# Altium PCB PCB1.PcbDoc
Units mil, origin at the board's own origin, x right, y up, seen from the top; angles counter-clockwise.
Board outline 620 x 910 mil, 2 copper layers (Top Layer, Bottom Layer); 15 components, 11 nets, 62 pads, 8 vias.
Unrouted connection lines stored in the file: 1.
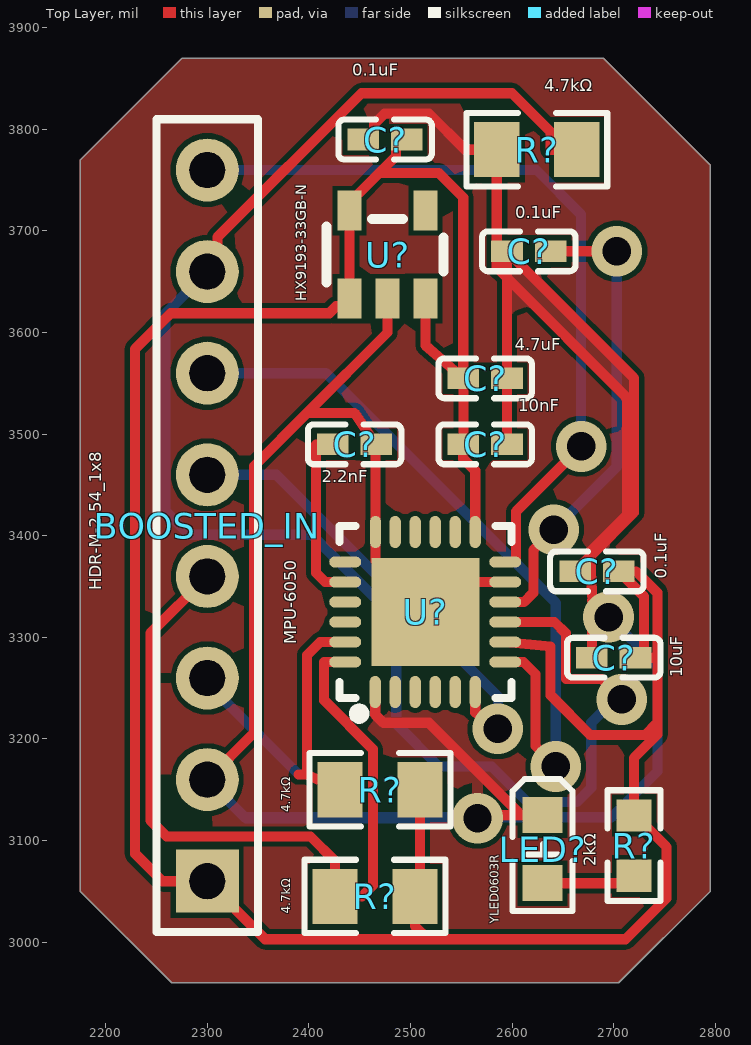
[diagram p0: Top Layer view]
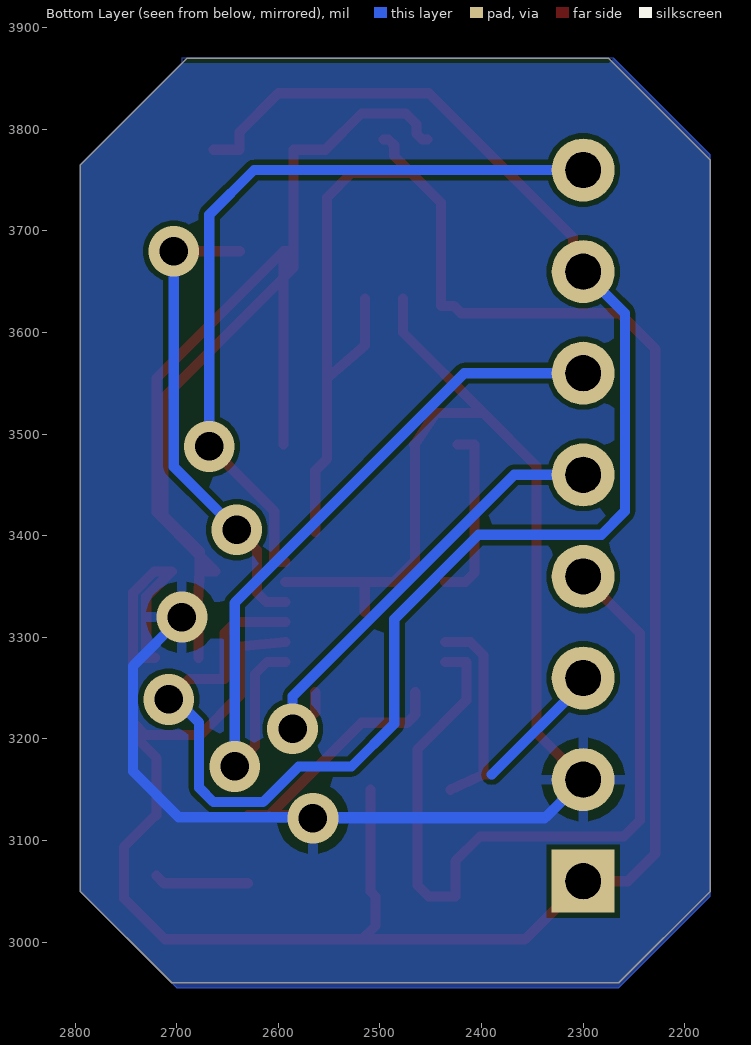
[diagram p1: Bottom Layer view, seen from below]

## Layer stack, top to bottom
Top Solder: solder mask 0.4, Solder Resist, Dk 3.5
Top Layer: signal copper 1.4
Dielectric 1: dielectric 12.6, FR-4, Dk 4.8
Bottom Layer: signal copper 1.4
Bottom Solder: solder mask 0.4, Solder Resist, Dk 3.5

## Board outline
2265,2960 2705,2960 2795,3050 2795,3765 2690,3870 2275,3870 2175,3770 2175,3050

## Design rules (kind name [scope] priority, off if disabled: settings)
Clearance [All] p1: gap=5 ignorepadtopadclearanceinfootprint=FALSE
PolygonConnect [All] p1: connectstyle=Relief reliefconductorwidth=10 reliefentries=4 polygonreliefangle="90 Angle" airgapwidth=10
RoutingVias [All] p1: holewidth=28 width=50 viastyle="Through Hole" minholewidth=28 minwidth=50 maxholewidth=28 maxwidth=50
SolderMaskExpansion [All] p1: expansion=4 istentingtop=FALSE
SupplyNets "Schematic Supply Nets_1" [InNet('+5')] p1: voltage=0.000
SupplyNets "Schematic Supply Nets" [InNet('GND')] p2: voltage=0.000
Width [All] p1: maxlimit=10 minlimit=10 preferedwidth=10
30 further rules are at their usual default settings.

## Classes and differential pairs
component class Sheet1: BOOSTED_IN C? LED? R? U?

## Components (designator, comment, footprint, x,y, rotation, side; value= is the part's Value field where it differs from the comment)
BOOSTED_IN "HDR-M-2.54_1x8" HDR-M-2.54_1X8 2300,3410 r90 top
C? "2.2nF" C0402 2445,3490 r0 top value=1uF
C? "0.1uF" C0402 2616.46,3680 r0 top value=1uF
C? "0.1uF" C0402 2475,3790 r0 top value=1uF
C? "10uF" C0402 2700,3280 r0 top value=1uF
C? "0.1uF" C0402 2683.54,3365 r0 top value=1uF
C? "10nF" C0402 2573.54,3490 r0 top value=1uF
C? "4.7uF" C0402 2573.54,3555 r180 top value=1uF
LED? "YLED0603R" LED0603-FD 2630,3091.53 r90 top
R? "2kΩ" R0603 2720,3095 r270 top
R? "4.7kΩ" R0805 2624.37,3780 r0 top
R? "4.7kΩ" R0805 2465,3045 r0 top
R? "4.7kΩ" R0805 2470,3150 r0 top
U? "HX9193-33GB-N" SOT-23-5_L2.9-W1.6-P0.95-LS2.8-BL 2477.4,3676.69 r0 top
U? "MPU-6050" QFN-24_L4.0-W4.0-P0.50-BL-EP2.7 2514.51,3325 r0 top

## Footprints (in the part's own frame and the unit in brackets; to place one, negate y for a bottom-side part, rotate by r counter-clockwise, add the part's x,y. Pads: shape width x height; smd on the part's side, far side on the other; paste and mask are expansions set on the pad)
C0402 [mm]
  rect 0.79x0.54 smd paste-100 mask+0.051: 1(-0.545,0) 2(0.545,0)
  silkscreen extent -1.17,-0.5 1.17,0.5
HDR-M-2.54_1X8 [mil]
  rect 62x62 hole 35 slot 35.2 at 0 deg paste-99999 mask+2: 1(-350,0)
  round 62 hole 35 slot 35.2 at 0 deg paste-99999 mask+2: 2(-250,0) 3(-150,0) 4(-50,0) 5(50,0) 6(150,0) 7(250,0) 8(350,0)
  silkscreen extent -400,-50 400,50
LED0603-FD [mm]
  rect 0.9x1 smd: 1(-0.85,0) 2(0.85,0)
  silkscreen extent -1.55,-0.75 1.75,0.75
QFN-24_L4.0-W4.0-P0.50-BL-EP2.7 [mm]
  oval 0.28x0.8 smd paste-100 mask+0.05: 1(-1.25,-2) 2(-0.75,-2) 3(-0.25,-2) 4(0.25,-2) 5(0.75,-2) 6(1.25,-2) 13(1.25,2) 14(0.75,2) 15(0.25,2) 16(-0.25,2) 17(-0.75,2) 18(-1.242,2)
  oval 0.8x0.28 smd paste-100 mask+0.05: 7(2,-1.25) 8(2,-0.75) 9(2,-0.25) 10(2,0.25) 11(2,0.75) 12(2,1.25) 19(-2,1.25) 20(-2,0.75) 21(-2,0.25) 22(-2,-0.25) 23(-2,-0.75) 24(-2,-1.25)
  rect 2.7x2.7 smd paste-100 mask+0.05: 25(0.012,0)
  silkscreen extent -2.14,-2.79 2.16,2.15
R0603 [mil]
  rect 31.75x34.02 smd paste-3937.01 mask+2: 1(-29.66,0) 2(29.66,0)
  silkscreen extent -55,-26 55,26
R0805 [mm]
  rect 1.133x1.377 smd paste-100 mask+0.051: 1(-1,0) 2(1,0)
  silkscreen extent -1.76,-0.92 1.76,0.92
SOT-23-5_L2.9-W1.6-P0.95-LS2.8-BL [mm]
  rect 0.6x1 smd paste+0 mask+0.05: 1(-0.95,-1.1) 2(0,-1.1) 3(0.95,-1.1) 4(0.95,1.1) 5(-0.95,1.1)
  silkscreen extent -1.52,-0.7 1.4,0.89

## Part data
C? C? C? C? C? C? C?: library part CL05A105KO5NNNC, JLCPCB Part Class="Extended Part", LCSC Part Name="1uF ±10% 16V", Manufacturer=SAMSUNG(三星), Tolerance=±10%, Add into BOM=yes, Convert to PCB=yes, Datasheet=https://atta.szlcsc.com/upload/public/pdf/source/20160218/1457707763339.pdf, Device=CL05A105KO5NNNC, Manufacturer Part=CL05A105KO5NNNC, Supplier=LCSC, Supplier Footprint=0402, Supplier Part=C29266, Symbol=CL05A105KO5NNNC
LED?: Color Temperature=-, Emitted Color=Red, Forward Current=25mA, Forward Voltage (VF)=1.8V~2.4V, JLCPCB Part Class="Extended Part", Manufacturer=YONGYUTAI(永裕泰), Operating Temperature=-40℃~+85℃, Add into BOM=yes, Convert to PCB=yes, Datasheet=https://atta.szlcsc.com/upload/public/pdf/source/20231027/FB19AF06E2C70028E58AB5CEDD1BDC72.pdf, Device=YLED0603R, Diode Configuration=-, Dominant Wavelength=620nm~625nm, LCSC Part Name=YLED0603R, Lens Color=-, Luminous Intensity=-, Manufacturer Part=YLED0603R, Mounting Sytle=-, Peak Wavelength=-, Power Dissipation=-, Supplier=LCSC, Supplier Footprint=0603, Supplier Part=C19171390, Symbol=YLED0603R, Viewing Angle=-
R?: library part 0603WAF2001T5E, JLCPCB Part Class="Basic Part", LCSC Part Name="2kΩ ±1% 100mW 厚膜电阻", Manufacturer=UNI-ROYAL(厚声), Operating Temperature Range=-55℃~+155℃, Temperature Coefficient=±100ppm/℃, Tolerance=±1%, Add into BOM=yes, Convert to PCB=yes, Datasheet=https://atta.szlcsc.com/upload/public/pdf/source/20200306/C422600_1E6D84923E4A46A82E41ADD87F860B5C.pdf, Device=0603WAF2001T5E, Manufacturer Part=0603WAF2001T5E, Supplier=LCSC, Supplier Footprint=0603, Supplier Part=C22975, Symbol=0603WAF2001T5E, Type="Thick Film Resistors"
R? R? R?: library part 0805W8F4701T5E, JLCPCB Part Class="Basic Part", LCSC Part Name="4.7kΩ ±1% 125mW 厚膜电阻", Manufacturer=UNI-ROYAL(厚声), Operating Temperature Range=-55℃~+155℃, Temperature Coefficient=±100ppm/℃, Tolerance=±1%, Add into BOM=yes, Convert to PCB=yes, Datasheet=https://atta.szlcsc.com/upload/public/pdf/source/20200306/C422600_1E6D84923E4A46A82E41ADD87F860B5C.pdf, Device=0805W8F4701T5E, Manufacturer Part=0805W8F4701T5E, Supplier=LCSC, Supplier Footprint=0805, Supplier Part=C17673, Symbol=0805W8F4701T5E, Type="Thick Film Resistors"
U?: JLCPCB Part Class="Extended Part", Manufacturer=HX(恒佳兴), Operating Temperature=-, Output Current=300mA, Output Voltage=3.3V, Add into BOM=yes, Convert to PCB=yes, Datasheet=https://atta.szlcsc.com/upload/public/pdf/source/20220412/18D9B33FD58646224E88440BBF52FED7.pdf, Device=HX9193-33GB-N, Features="Low ESR；Overcurrent Protection(OCP)；With ability", LCSC Part Name=HX9193-33GB-N, Manufacturer Part=HX9193-33GB-N, Noise=-, Number of Outputs=-, Output Configuration=-, Output Type=-, Power Supply Rejection Ratio (PSRR)=-, standby current=-, Supplier=LCSC, Supplier Footprint=SOT-23-5, Supplier Part=C2995655, Symbol=HX9193-33GB-N, Voltage - Supply=-, Voltage Dropout=-
U?: JLCPCB Part Class="Extended Part", Manufacturer="TDK InvenSense(应美盛)", Operating Temperature=-40℃~+85℃, Add into BOM=yes, Convert to PCB=yes, Datasheet=https://atta.szlcsc.com/upload/public/pdf/source/20140425/1457707046159.pdf, Device=MPU-6050, LCSC Part Name=MPU-6050, Manufacturer Part=MPU-6050, Sensor Type=加速度计陀螺仪, Supplier=LCSC, Supplier Footprint=QFN-24-EP(4x4), Supplier Part=C24112, Symbol=MPU-6050_C24112

## Via types
v1: diameter 50, hole 28, Top Layer to Bottom Layer, 8 vias

## Nets (pads, with @x,y where several pads share a name; then routed paths per layer and width w, separated by ;. In a path a pad name is that pad's centre, name@x,y a point inside that pad or via, vN(x,y) a via of type N, cw(c..) or ccw(c..) an arc to the next point about the centre after c; other vN are vias at no path point)
+5: BOOSTED_IN.1 C?.1@2552.08,3490 C?.2@2496.46,3790 C?.2@2552.08,3555 C?.2@2705,3365 C?.2@2721.46,3280 R?.1@2720,3124.66 R?.2@2504.37,3045 R?.2@2509.37,3150 U?.1@2440,3633.38 U?.3@2514.8,3633.38 U?.5@2440,3720 U?.8 U?.13 | length 2874.1
  Top Layer w10: C?.2@2496.46,3790 2491.54,3790 2485.91,3784.37 2485.91,3773.78 2469.13,3757 ; R?.2@2509.37,3150 2509.37,3050 2504.37,3045 2504.37,3016 2517.48,3002.89 ; U?.3@2514.8,3633.38 2514.8,3587.36 C?.2@2552,3555 ; U?.13 2563.72,3464 2552,3475.72 2552,3490 2552.08,3490 2552.08,3555 C?.2@2552,3555 ; U?.8 2637.99,3291.01 2637.99,3243.02 2677,3204 2731,3204 2743,3216 ; C?.2@2721.46,3280 C?.2@2730,3280 ; 2469.13,3757 2528,3757 2552,3733 C?.2@2552,3555 ; 2469.13,3757 2440,3727.87 2440,3720 2440,3633.38 2440,3626 2427,3626 2420,3619 2264,3619 2229,3584 2229,3087 2256,3060 BOOSTED_IN.1 2357.11,3002.89 2517.48,3002.89 ; 2517.48,3002.89 2711.65,3002.89 2752.01,3043.25 2752.01,3093.78 2721.13,3124.66 2720,3124.66 2720,3181.37 2743,3204.37 2743,3216 ; C?.2@2730,3280 2743,3280 ; C?.2@2730,3280 2730,3340 2705,3365 2722,3365 2743,3344 2743,3280 ; 2743,3216 2743,3280
GND: BOOSTED_IN.2 C?.1@2453.54,3790 C?.1@2595,3555 C?.1@2595,3680 C?.1@2662.08,3365 C?.1@2678.54,3280 C?.2@2466.46,3490 C?.2@2595,3490 LED?.2 R?.1@2585,3780 U?.1@2465.3,3246.26 U?.2@2477.4,3633.38 U?.11 U?.18 U?.25 | length 3415.2
  Top Layer w10: BOOSTED_IN.2 2346,3206 2346,3468.6 2398.4,3521 ; C?.1@2453.54,3790 2458.46,3790 2464.09,3795.63 2464.09,3805.03 2474.69,3815.63 2518.23,3815.63 2553.86,3780 2585,3780 C?.1@2585,3680 ; U?.1@2465.3,3246.26 2465.3,3224 2473.3,3216 2518,3216 2609,3125 ; C?.2@2466.46,3490 C?.2@2465.61,3490 ; U?.2@2477.4,3633.38 2477.4,3600 2398.4,3521 ; U?.25 U?.25@2515,3354.53 ; v1(2566,3122) 2569,3125 2609,3125 ; U?.11 U?.25@2515,3354.53 ; C?.2@2595,3490 2595,3555 2595,3654.03 ; LED?.2 2609,3125 ; C?.1@2678.54,3280 v1@2678.54,3320 ; v1(2695,3320) v1@2678.54,3320 ; 2398.4,3521 2445,3521 C?.2@2465.61,3490 ; C?.2@2465.61,3490 U?.18 2465.61,3375.39 2486.47,3354.53 U?.25@2515,3354.53 ; C?.1@2585,3680 2585,3664.03 2595,3654.03 ; C?.1@2585,3680 C?.1@2595,3680 ; 2595,3654.03 2713.03,3536 2713.03,3420.42 2677.41,3384.81 2677.41,3380.33 ; 2595,3654.03 C?.1@2595,3680 ; C?.1@2595,3680 2720,3555 2720,3422.92 2677.41,3380.33 ; C?.1@2677.41,3365 2677.41,3380.33 ; C?.1@2677.41,3365 2679,3336 2678.55,3320.47 v1@2678.54,3320 ; C?.1@2677.41,3365 2662.08,3365 2677.41,3380.33
  Bottom Layer w10: BOOSTED_IN.2 2337,3123 ; v1(2566,3122) 2338,3122 2337,3123 ; v1(2695,3320) 2743,3272 2743,3168 2698,3123 2337,3123
NetBOOSTED_IN_3: BOOSTED_IN.3 R?.1@2430.63,3150 U?.23 | length 336.7
  Top Layer w10: 2390,3165 2398.13,3165 ; R?.1@2430.63,3150 2398.13,3165 ; U?.23 2411.05,3295.47 2398.13,3282.56 2398.13,3165
  Bottom Layer w10: BOOSTED_IN.3 2300,3255 2390,3165
NetBOOSTED_IN_4: BOOSTED_IN.4 R?.1@2425.63,3045 U?.24 | length 798.8
  Top Layer w10: BOOSTED_IN.4 2244,3304 2244,3120 2260,3104 2401.63,3104 2425.63,3080 2425.63,3045 2452,3045 2463,3056 2463,3190 2415,3238 2415,3275.79 U?.24
NetBOOSTED_IN_5: BOOSTED_IN.5 U?.6 | length 456
  Top Layer w10: U?.6 2563.72,3226 v1(2586,3210)
  Bottom Layer w10: BOOSTED_IN.5 2368,3460 2586,3242 v1(2586,3210)
NetBOOSTED_IN_6: BOOSTED_IN.6 U?.7 | length 731.5
  Top Layer w10: U?.7 2611.2,3275.79 2622.99,3264 2622.99,3193.01 v1(2643,3173)
  Bottom Layer w10: BOOSTED_IN.6 2417,3560 2643,3334 v1(2643,3173)
NetBOOSTED_IN_7: BOOSTED_IN.7 R?.2@2663.74,3780 U?.9 | length 1616.5
  Top Layer w10: BOOSTED_IN.7 2309.95,3669.95 2309.95,3693.81 2451.77,3835.63 2599.98,3835.63 2638.15,3797.46 2638.15,3780 R?.2@2663.74,3780 ; U?.9 2641.83,3315.16 2652.99,3304 2652.99,3259 2688,3259 v1(2708,3239)
  Bottom Layer w10: BOOSTED_IN.7 2259,3619 2259,3424 2282,3401 2403,3401 2486,3318 2486,3215 2528,3173 2580,3173 2615,3138 2664,3138 2678,3152 2678,3216 2701,3239 v1(2708,3239)
NetBOOSTED_IN_8: BOOSTED_IN.8 U?.12 | length 765.3
  Top Layer w10: U?.12 2604,3374.21 2604,3424 v1(2668,3488)
  Bottom Layer w10: BOOSTED_IN.8 2624,3760 2668,3716 v1(2668,3488)
NetC?_1: C?.1@2423.54,3490 U?.20 | length 175.5
  Top Layer w10: C?.1@2423.54,3490 2407,3490 2407,3363.53 2416,3354.53 U?.20
NetC?_2: C?.2@2637.92,3680 U?.10 | length 466.6
  Top Layer w10: U?.10 2611.84,3334.84 2621,3344 2621,3386 v1(2641,3406) ; C?.2@2637.92,3680 v1(2703,3680)
  Bottom Layer w10: v1(2641,3406) 2703,3468 v1(2703,3680)
NetLED?_1: LED?.1 R?.2@2720,3065.34 | length 93
  Top Layer w10: LED?.1 2712.73,3058.07 R?.2@2720,3065.34
pads on no net: U?.2@2484.98,3246.26 U?.3@2504.67,3246.26 U?.4 U?.5@2544.04,3246.26 U?.14 U?.15 U?.16 U?.17 U?.19 U?.21 U?.22

## Polygon pours and split planes (outlines as drawn)
GND on Top Layer "GND_L01_P002" (solid, pour order 2): 2175,3770 2275,3870 2690,3870 2795,3765 2795,3050 2705,2960 2265,2960 2175,3050
no net on Top Layer "NONET_L01_P001" (solid, pour order 1): 2265,2960 2705,2960 2795,3050 2795,3765 2690,3870 2275,3870 2175,3770 2175,3050
no net on Top Layer "NONET_L01_P000" (solid, pour order 0): 2175,3770 2275,3870 2690,3870 2795,3765 2795,3050 2705,2960 2265,2960 2175,3050
GND on Bottom Layer "GND_L02_P004" (solid, pour order 4): 2175,3775 2175,3045 2265,2955 2700,2955 2795,3050 2795,3765 2695,3865 2275,3865 2270,3870
no net on Bottom Layer "NONET_L02_P003" (solid, pour order 3): 2270,3870 2695,3870 2695,3865 2795,3765 2795,3050 2700,2955 2265,2955 2175,3045 2175,3775